# EAGLE board final (EAGLE 5.01)
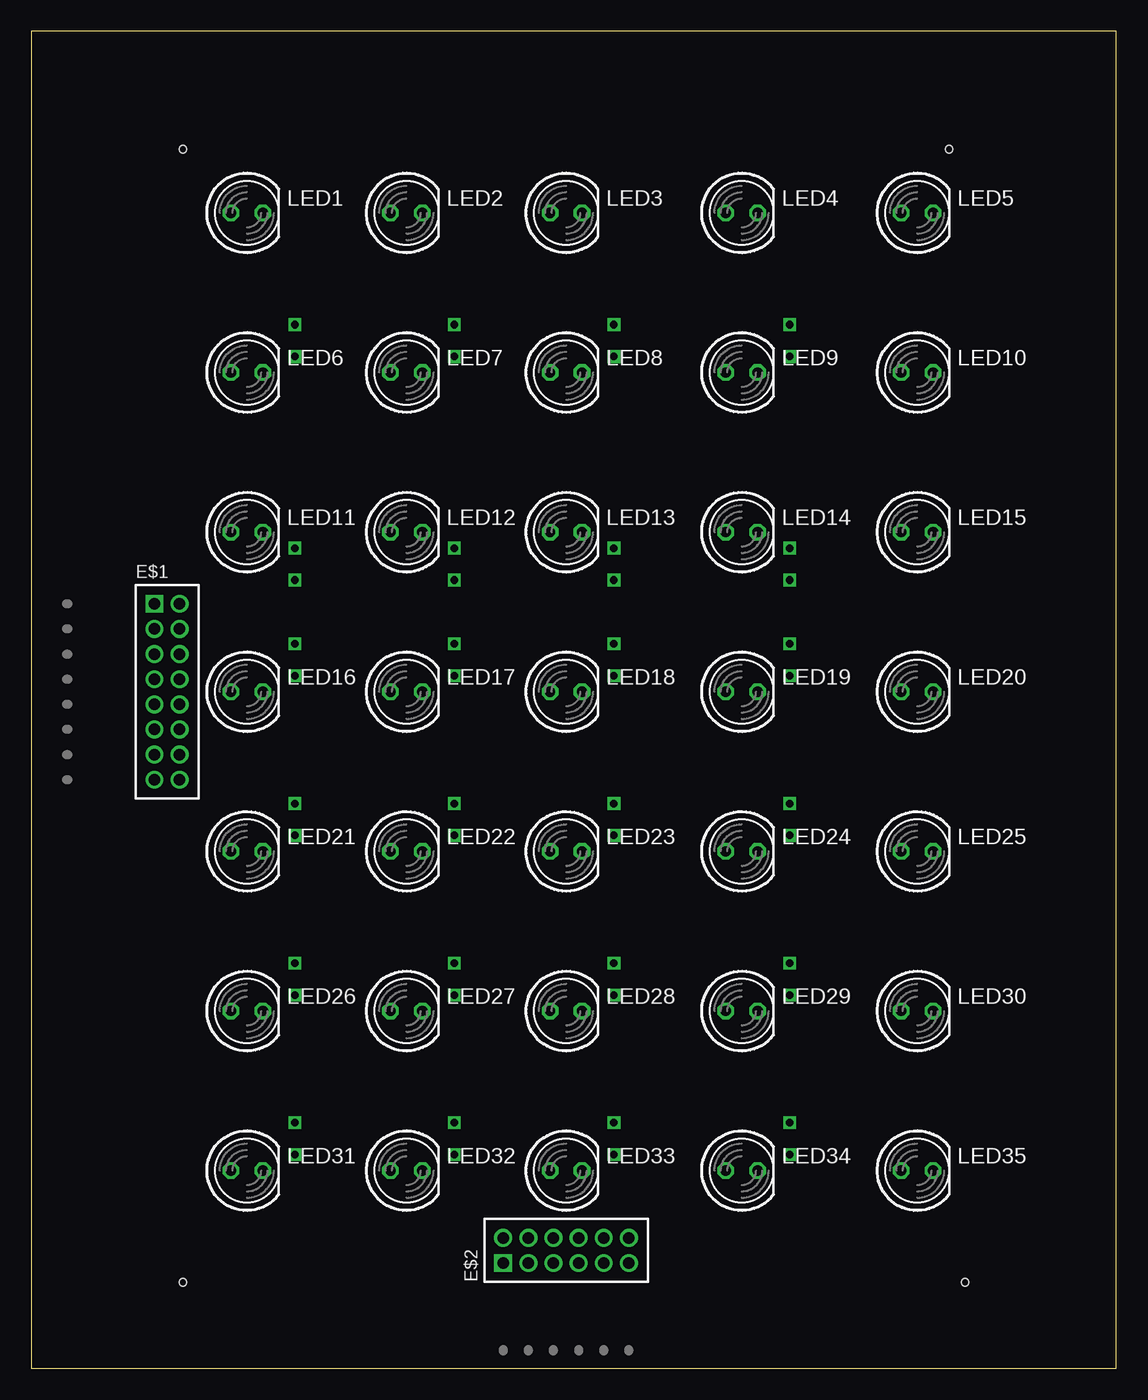
[diagram p0: board, top side]
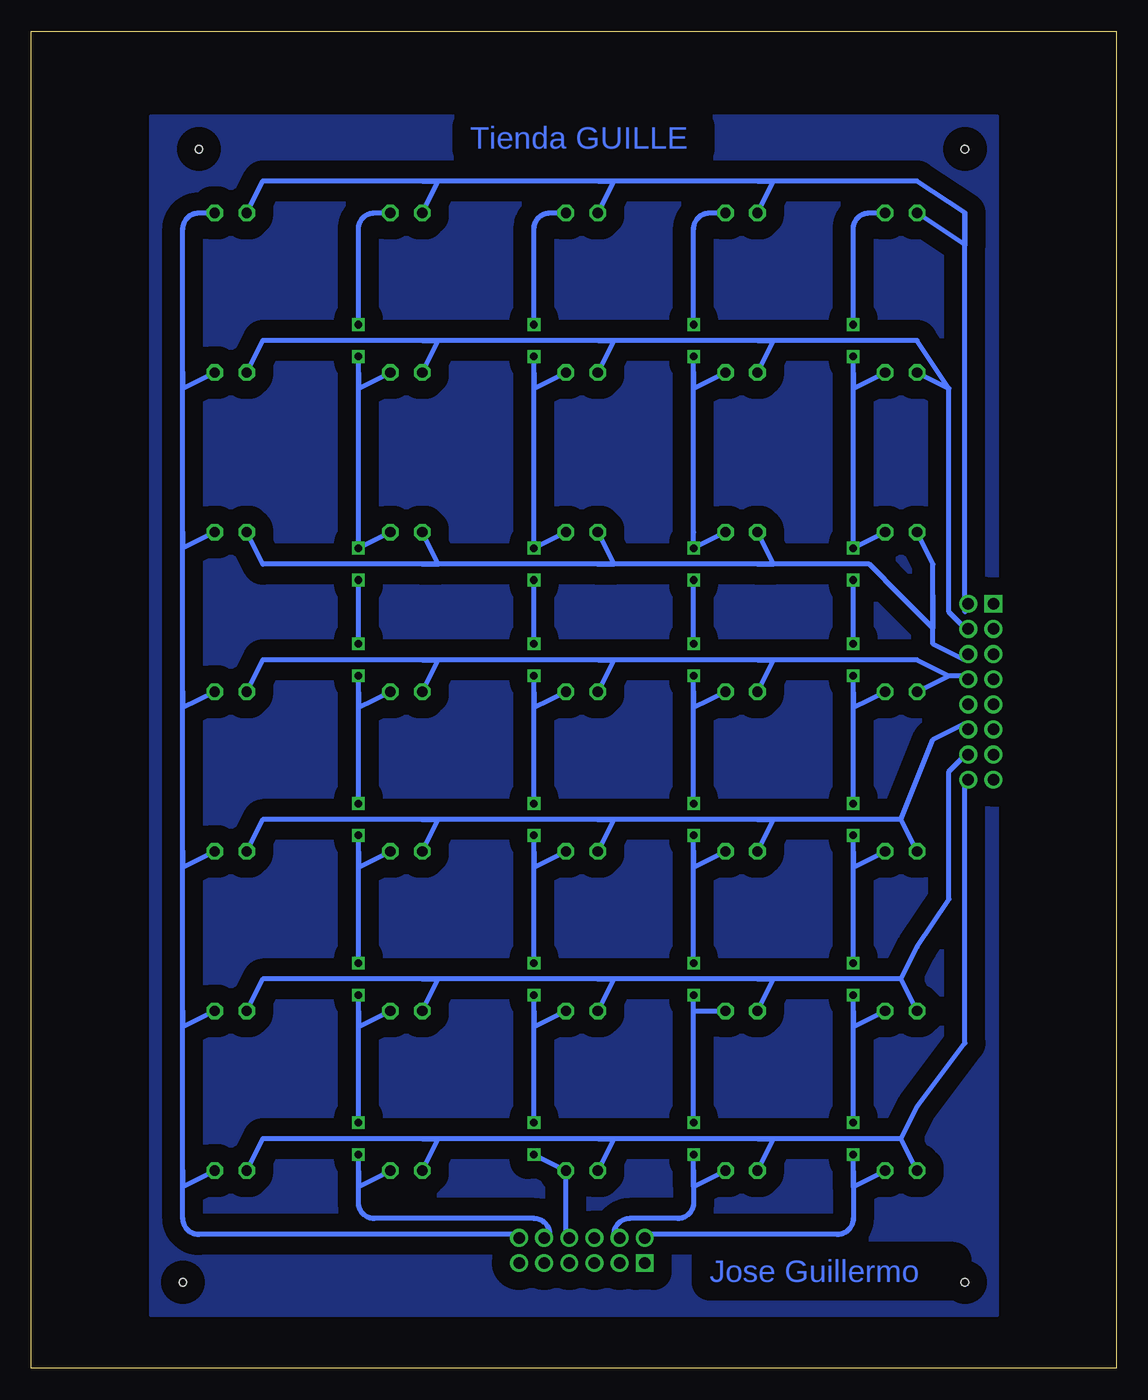
[diagram p1: board, bottom side, seen from below]

Size 86.34 x 106.35 mm. Coordinates in mm from the lower left corner, seen from the top.
Outline: 0,0 86.34,0 86.34,106.35 0,106.35 0,0
Copper layers (1*16): Top 0.035mm / dielectric 1.5mm / Bottom 0.035mm
Design rules "default *": minimum track width 10mil, minimum drill 24mil, track to track 8mil, track to pad 8mil, pad to pad 8mil, via to via 8mil, smd to smd 8mil, copper to edge 40mil, drill to drill 8mil, minimum pad ring 10mil, minimum via ring 8mil, stop-mask expansion 4mil, vias tented up to drill 0mil, thermal gap 10mil
Holes 0.6 mm at 74.29,6.82 12.06,6.82 73.02,96.99 12.06,96.99

## Footprints (pad centres in the part's own frame; a part is rotated, then mirrored left to right if it is on the bottom)
87760-16 = drill 0.914 square: 1 -7,-1 | drill 0.914 round: 2 -7,1; 3 -5,-1; 4 -5,1; 5 -3,-1; 6 -3,1; 7 -1,-1; 8 -1,1; 9 1,-1; 10 1,1; 11 3,-1; 12 3,1; 13 5,-1; 14 5,1; 15 7,-1; 16 7,1
87760-12 = drill 0.914 square: 1 -5,-1 | drill 0.914 round: 2 -5,1; 3 -3,-1; 4 -3,1; 5 -1,-1; 6 -1,1; 7 1,-1; 8 1,1; 9 3,-1; 10 3,1; 11 5,-1; 12 5,1
LED5MM = drill 0.813 octagon: A -1.27,0; K 1.27,0

## Placement (x,y rotation side)
E$1  [87760-16]  10.79,53.81 270 top
E$2  [87760-12]  42.54,9.36 0 top
LED1  [LED5MM]  17.14,91.91 0 top
LED2  [LED5MM]  29.84,91.91 0 top
LED3  [LED5MM]  42.54,91.91 0 top
LED4  [LED5MM]  56.51,91.91 0 top
LED5  [LED5MM]  70.48,91.91 0 top
LED6  [LED5MM]  17.14,79.21 0 top
LED7  [LED5MM]  29.84,79.21 0 top
LED8  [LED5MM]  42.54,79.21 0 top
LED9  [LED5MM]  56.51,79.21 0 top
LED10  [LED5MM]  70.48,79.21 0 top
LED11  [LED5MM]  17.14,66.51 0 top
LED12  [LED5MM]  29.84,66.51 0 top
LED13  [LED5MM]  42.54,66.51 0 top
LED14  [LED5MM]  56.51,66.51 0 top
LED15  [LED5MM]  70.48,66.51 0 top
LED16  [LED5MM]  17.14,53.81 0 top
LED17  [LED5MM]  29.84,53.81 0 top
LED18  [LED5MM]  42.54,53.81 0 top
LED19  [LED5MM]  56.51,53.81 0 top
LED20  [LED5MM]  70.48,53.81 0 top
LED21  [LED5MM]  17.14,41.11 0 top
LED22  [LED5MM]  29.84,41.11 0 top
LED23  [LED5MM]  42.54,41.11 0 top
LED24  [LED5MM]  56.51,41.11 0 top
LED25  [LED5MM]  70.48,41.11 0 top
LED26  [LED5MM]  17.14,28.41 0 top
LED27  [LED5MM]  29.84,28.41 0 top
LED28  [LED5MM]  42.54,28.41 0 top
LED29  [LED5MM]  56.51,28.41 0 top
LED30  [LED5MM]  70.48,28.41 0 top
LED31  [LED5MM]  17.14,15.71 0 top
LED32  [LED5MM]  29.84,15.71 0 top
LED33  [LED5MM]  42.54,15.71 0 top
LED34  [LED5MM]  56.51,15.71 0 top
LED35  [LED5MM]  70.48,15.71 0 top

## Library data of the parts
E$1 E$2 = con-molex-milli-grid
LED1-LED35 = led

## Nets
S$1: LED1.K
S$3: LED5.K LED10.K LED15.K LED20.K LED25.K LED30.K LED35.K
S$4: LED16.A LED17.A LED18.A LED19.A LED20.A
S$5: LED33.K
S$6: LED26.A LED27.A LED28.A LED29.A LED30.A
S$7: LED21.A LED22.A LED23.A LED24.A LED25.A
S$8: LED31.K
S$9: LED32.K
S$10: LED11.A LED12.A LED13.A LED14.A LED15.A
S$11: LED34.K
S$12: LED6.A LED7.A LED8.A LED9.A LED10.A
S$13: LED1.A LED2.A LED3.A LED4.A LED5.A
S$14: LED6.K LED11.K
S$16: LED16.K
S$17: LED21.K
S$18: LED26.K
S$19: LED27.K
S$20: LED22.K
S$21: LED17.K
S$23: LED7.K LED12.K
S$24: LED2.K
S$25: LED3.K
S$26: LED8.K LED13.K
S$28: LED18.K
S$29: LED23.K
S$30: LED28.K
S$31: LED29.K
S$32: LED24.K
S$33: LED19.K
S$35: LED9.K LED14.K
S$36: LED4.K
S$37: LED31.A LED32.A LED33.A LED34.A LED35.A

## Tracks (layer width: path | path; a pad name or v marks a point on that pad's centre or on a via)
S$1  (via drill 0.6)
  Bottom 0.406: LED1.K 19.68,91.91 arc-90 20.95,90.64 v20.95,83.02
S$2
  pour Bottom (isolate 1.422): 9.52,99.53 76.83,99.53 76.83,4.28 9.52,4.28
S$3
  Bottom 0.406: 74.29,79.21 74.29,90.64 arc90 73.02,91.91 LED5.K | 74.29,79.21 74.29,77.94 LED10.K | 74.29,66.51 74.29,79.21 | 74.29,66.51 74.29,65.24 LED15.K | 74.29,53.81 74.29,66.51 | 74.29,53.81 74.29,52.54 LED20.K | 74.29,41.11 74.29,53.81 | 74.29,41.11 74.29,39.84 LED25.K | 74.29,28.41 74.29,41.11 | 74.29,28.41 74.29,27.14 LED30.K | 74.29,15.71 74.29,14.44 LED35.K | 74.29,15.71 74.29,28.41 | 47.62,10.63 73.02,10.63 arc90 74.29,11.9 74.29,15.71
S$4
  Bottom 0.406: 12.06,55.08 13.33,55.08 | 28.57,56.35 15.87,56.35 13.33,55.08 | 28.57,56.35 41.27,56.35 | 41.27,56.35 55.24,56.35 | 55.24,56.35 67.94,56.35 LED20.A | LED19.A 53.97,56.35 55.24,56.35 | LED18.A 40,56.35 41.27,56.35 | LED17.A 27.3,56.35 28.57,56.35 | 13.33,55.08 LED16.A
S$5  (via drill 0.6)
  Bottom 0.406: 43.81,10.63 LED33.K v46.35,16.98
S$6
  Bottom 0.406: LED29.A 53.97,30.95 55.24,30.95 | LED30.A 67.94,30.95 55.24,30.95 | 12.06,48.73 13.33,47.46 13.33,37.3 15.87,33.49 17.14,30.95 | LED28.A 40,30.95 41.27,30.95 | LED27.A 27.3,30.95 28.57,30.95 | 41.27,30.95 55.24,30.95 | 28.57,30.95 41.27,30.95 | 17.14,30.95 28.57,30.95 | LED26.A 17.14,30.95
S$7
  Bottom 0.406: LED24.A 53.97,43.65 55.24,43.65 | LED25.A 67.94,43.65 55.24,43.65 | LED23.A 40,43.65 41.27,43.65 | LED22.A 27.3,43.65 28.57,43.65 | 41.27,43.65 55.24,43.65 | 28.57,43.65 41.27,43.65 | 17.14,43.65 14.6,50 12.06,51.27 | 17.14,43.65 28.57,43.65 | LED21.A 17.14,43.65
S$8  (via drill 0.6)
  Bottom 0.406: LED31.K 20.95,14.44 20.95,15.71 | 37.46,10.63 22.22,10.63 arc-90 20.95,11.9 20.95,15.71 | 20.95,15.71 v20.95,16.98
S$9  (via drill 0.6)
  Bottom 0.406: 40,10.63 arc90 38.73,11.9 34.92,11.9 arc-90 33.65,13.17 33.65,15.71 | 33.65,15.71 33.65,14.44 LED32.K | 33.65,15.71 v33.65,16.98
S$10
  Bottom 0.406: LED14.A 53.97,63.97 55.24,63.97 | LED15.A 67.94,63.97 55.24,63.97 | LED13.A 40,63.97 41.27,63.97 | LED12.A 27.3,63.97 28.57,63.97 | 41.27,63.97 55.24,63.97 | 28.57,63.97 41.27,63.97 | 28.57,63.97 19.68,63.97 17.14,61.43 14.6,58.89 14.6,61.43 | 14.6,61.43 14.6,57.62 12.06,56.35 | 14.6,61.43 14.6,63.97 LED11.A
S$11  (via drill 0.6)
  Bottom 0.406: LED34.K 60.32,14.44 60.32,15.71 | 60.32,15.71 60.32,13.17 arc-90 59.05,11.9 46.35,11.9 arc90 45.08,10.63 | 60.32,15.71 v60.32,16.98
S$12
  Bottom 0.406: 13.33,77.94 LED6.A | 13.33,77.94 13.33,60.16 12.06,58.89 | 13.33,77.94 15.87,81.75 28.57,81.75 | LED9.A 53.97,81.75 55.24,81.75 | LED10.A 67.94,81.75 55.24,81.75 | LED8.A 40,81.75 41.27,81.75 | LED7.A 27.3,81.75 28.57,81.75 | 41.27,81.75 55.24,81.75 | 28.57,81.75 41.27,81.75
S$13
  Bottom 0.406: LED5.A 67.94,94.45 55.24,94.45 | 12.06,91.91 15.87,94.45 28.57,94.45 | 12.06,60.16 12.06,91.91 | 41.27,94.45 55.24,94.45 | 28.57,94.45 41.27,94.45 | 28.57,94.45 27.3,94.45 LED2.A | 41.27,94.45 40,94.45 LED3.A | 55.24,94.45 53.97,94.45 LED4.A | 12.06,91.91 12.06,89.37 LED1.A
S$14  (via drill 0.6)
  Bottom 0.406: 20.95,79.21 v20.95,80.48 | 20.95,79.21 20.95,66.51 v20.95,65.24 LED11.K | LED6.K 20.95,77.94 20.95,79.21
S$15  (via drill 0.6)
  Bottom 0.406: v20.95,57.62 v20.95,62.7
S$16  (via drill 0.6)
  Bottom 0.406: 20.95,53.81 v20.95,55.08 | v20.95,44.92 20.95,53.81 | LED16.K 20.95,52.54 20.95,53.81
S$17  (via drill 0.6)
  Bottom 0.406: 20.95,41.11 v20.95,42.38 | v20.95,32.22 20.95,41.11 | LED21.K 20.95,39.84 20.95,41.11
S$18  (via drill 0.6)
  Bottom 0.406: 20.95,28.41 v20.95,29.68 | v20.95,19.52 20.95,28.41 | LED26.K 20.95,27.14 20.95,28.41
S$19  (via drill 0.6)
  Bottom 0.406: v33.65,19.52 33.65,28.41 | 33.65,28.41 v33.65,29.68 | 33.65,28.41 LED27.K
S$20  (via drill 0.6)
  Bottom 0.406: v33.65,32.22 33.65,41.11 | 33.65,41.11 v33.65,42.38 | LED22.K 33.65,39.84 33.65,41.11
S$21  (via drill 0.6)
  Bottom 0.406: v33.65,44.92 33.65,53.81 | 33.65,53.81 v33.65,55.08 | LED17.K 33.65,52.54 33.65,53.81
S$22  (via drill 0.6)
  Bottom 0.406: v33.65,57.62 v33.65,62.7
S$23  (via drill 0.6)
  Bottom 0.406: 33.65,79.21 33.65,66.51 v33.65,65.24 LED12.K | 33.65,79.21 v33.65,80.48 | LED7.K 33.65,77.94 33.65,79.21
S$24  (via drill 0.6)
  Bottom 0.406: v33.65,83.02 33.65,90.64 arc90 32.38,91.91 LED2.K
S$25  (via drill 0.6)
  Bottom 0.406: LED3.K 45.08,91.91 arc-90 46.35,90.64 v46.35,83.02
S$26  (via drill 0.6)
  Bottom 0.406: 46.35,79.21 v46.35,80.48 | LED8.K 46.35,77.94 46.35,79.21 | LED13.K v46.35,65.24 46.35,79.21
S$27  (via drill 0.6)
  Bottom 0.406: v46.35,57.62 v46.35,62.7
S$28  (via drill 0.6)
  Bottom 0.406: 46.35,53.81 v46.35,55.08 | v46.35,44.92 46.35,53.81 | LED18.K 46.35,52.54 46.35,53.81
S$29  (via drill 0.6)
  Bottom 0.406: 46.35,41.11 v46.35,42.38 | v46.35,32.22 46.35,41.11 | LED23.K 46.35,39.84 46.35,41.11
S$30  (via drill 0.6)
  Bottom 0.406: v46.35,19.52 46.35,28.41 | 46.35,28.41 v46.35,29.68 | 46.35,28.41 46.35,27.14 LED28.K
S$31  (via drill 0.6)
  Bottom 0.406: v60.32,19.52 60.32,28.41 | 60.32,28.41 v60.32,29.68 | LED29.K 60.32,27.14 60.32,28.41
S$32  (via drill 0.6)
  Bottom 0.406: v60.32,32.22 60.32,41.11 | 60.32,41.11 v60.32,42.38 | LED24.K 60.32,39.84 60.32,41.11
S$33  (via drill 0.6)
  Bottom 0.406: v60.32,44.92 60.32,53.81 | 60.32,53.81 v60.32,55.08 | LED19.K 60.32,52.54 60.32,53.81
S$34  (via drill 0.6)
  Bottom 0.406: v60.32,57.62 v60.32,62.7
S$35  (via drill 0.6)
  Bottom 0.406: 60.32,79.21 60.32,66.51 v60.32,65.24 LED14.K | 60.32,79.21 v60.32,80.48 | LED9.K 60.32,77.94 60.32,79.21
S$36  (via drill 0.6)
  Bottom 0.406: v60.32,83.02 60.32,90.64 arc90 59.05,91.91 LED4.K
S$37
  Bottom 0.406: 12.06,46.19 12.06,25.87 15.87,20.79 17.14,18.25 | LED34.A 53.97,18.25 55.24,18.25 | LED35.A 67.94,18.25 55.24,18.25 | LED33.A 40,18.25 41.27,18.25 | LED32.A 27.3,18.25 28.57,18.25 | 41.27,18.25 55.24,18.25 | 28.57,18.25 41.27,18.25 | 17.14,18.25 28.57,18.25 | LED31.A 17.14,18.25

## Text on the board
Bottom: Tienda GUILLE | Jose Guillermo